# Altium PCB BoostUC3843.PcbDoc
Units mil, origin at the board's own origin, x right, y up, seen from the top; angles counter-clockwise.
Board outline 1560 x 1475 mil, 2 copper layers (Top Layer, Bottom Layer); 28 components, 16 nets, 67 pads, 2 vias.
Unrouted connection lines stored in the file: 13.
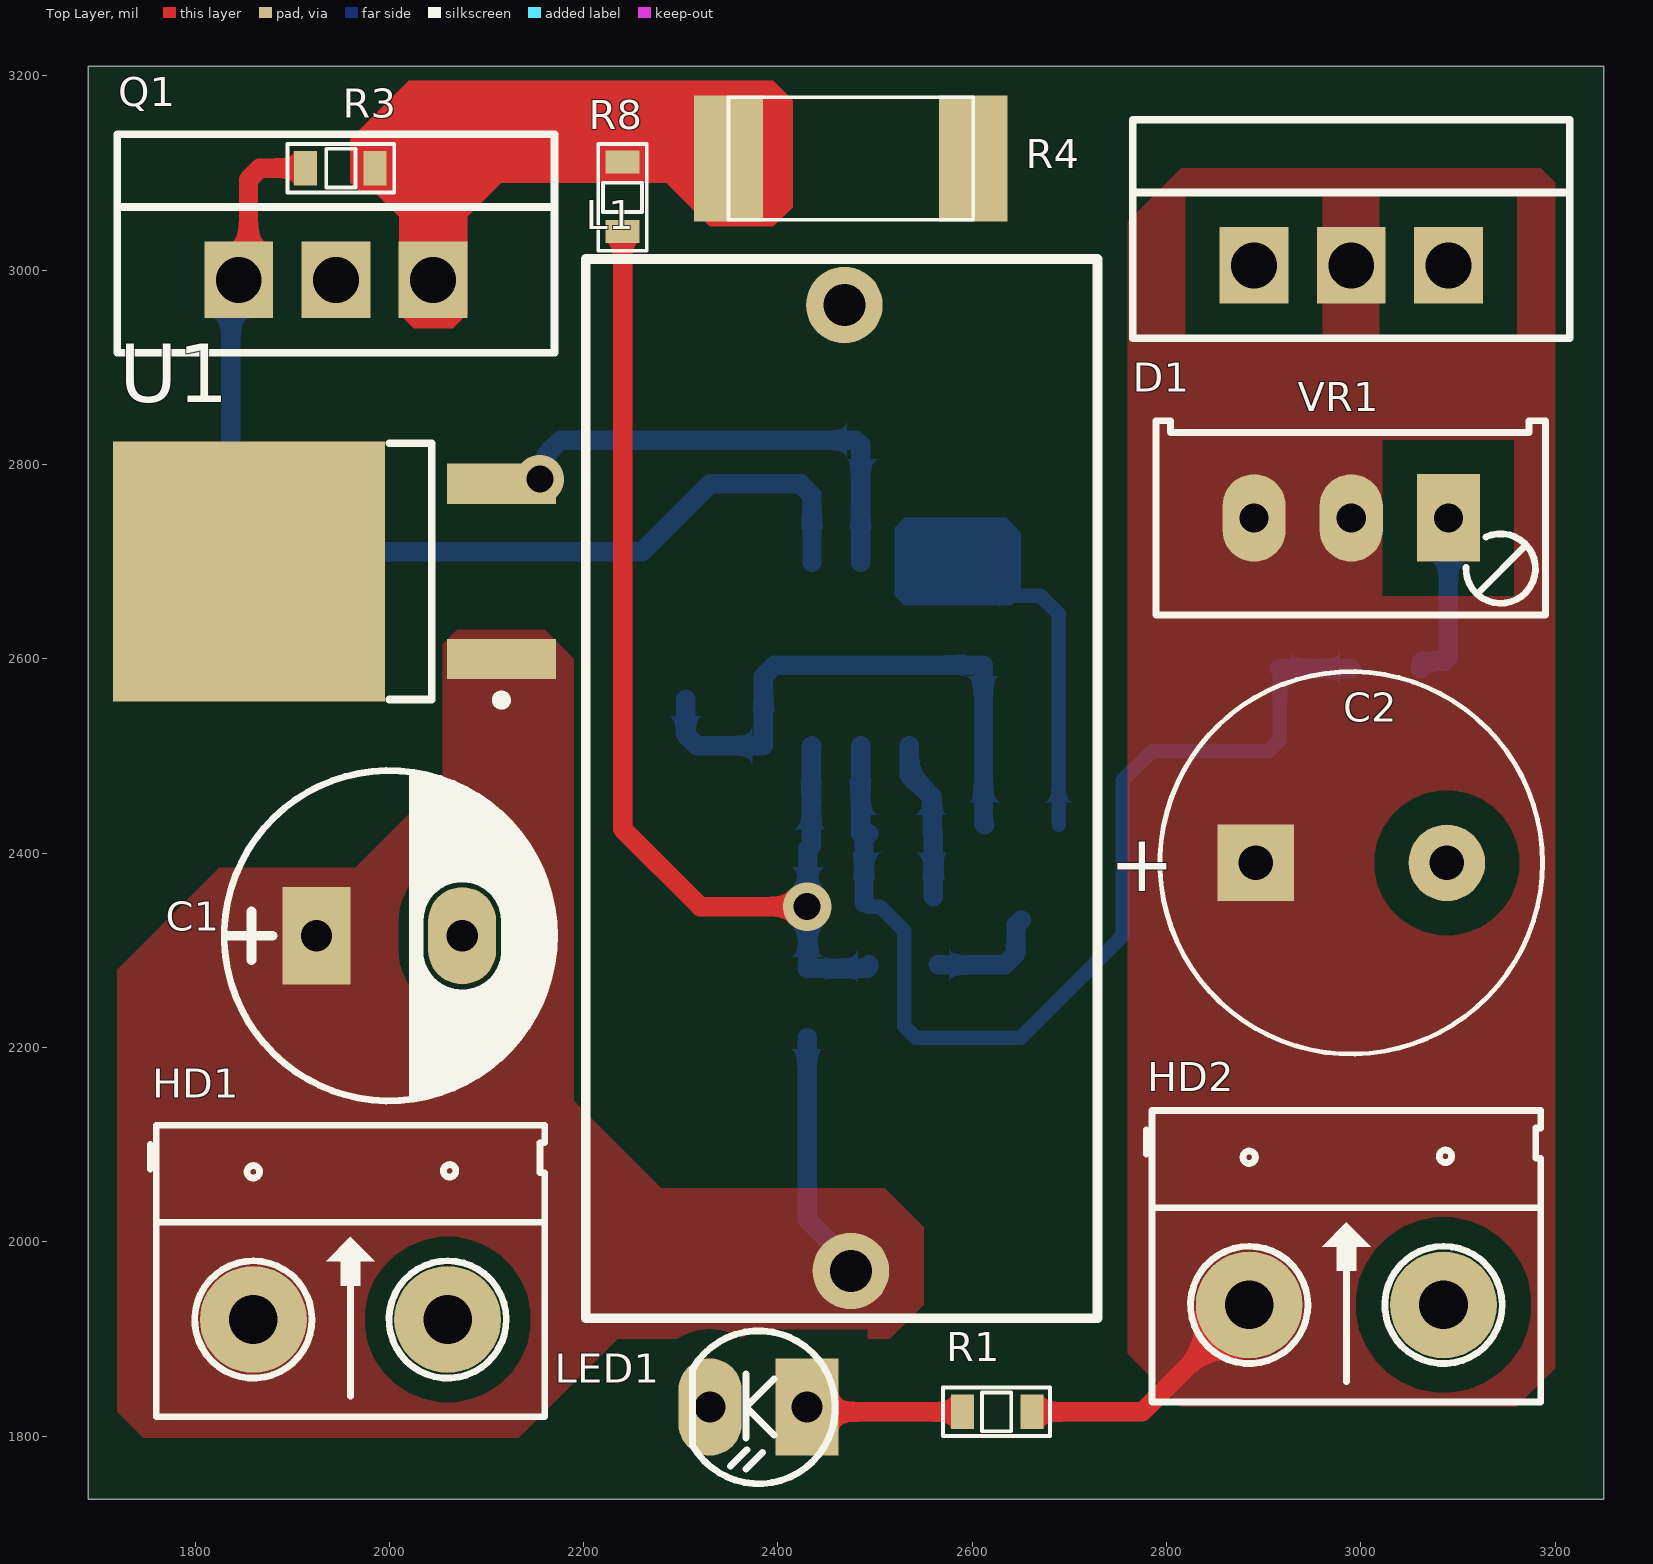
[diagram p0: Top Layer view]
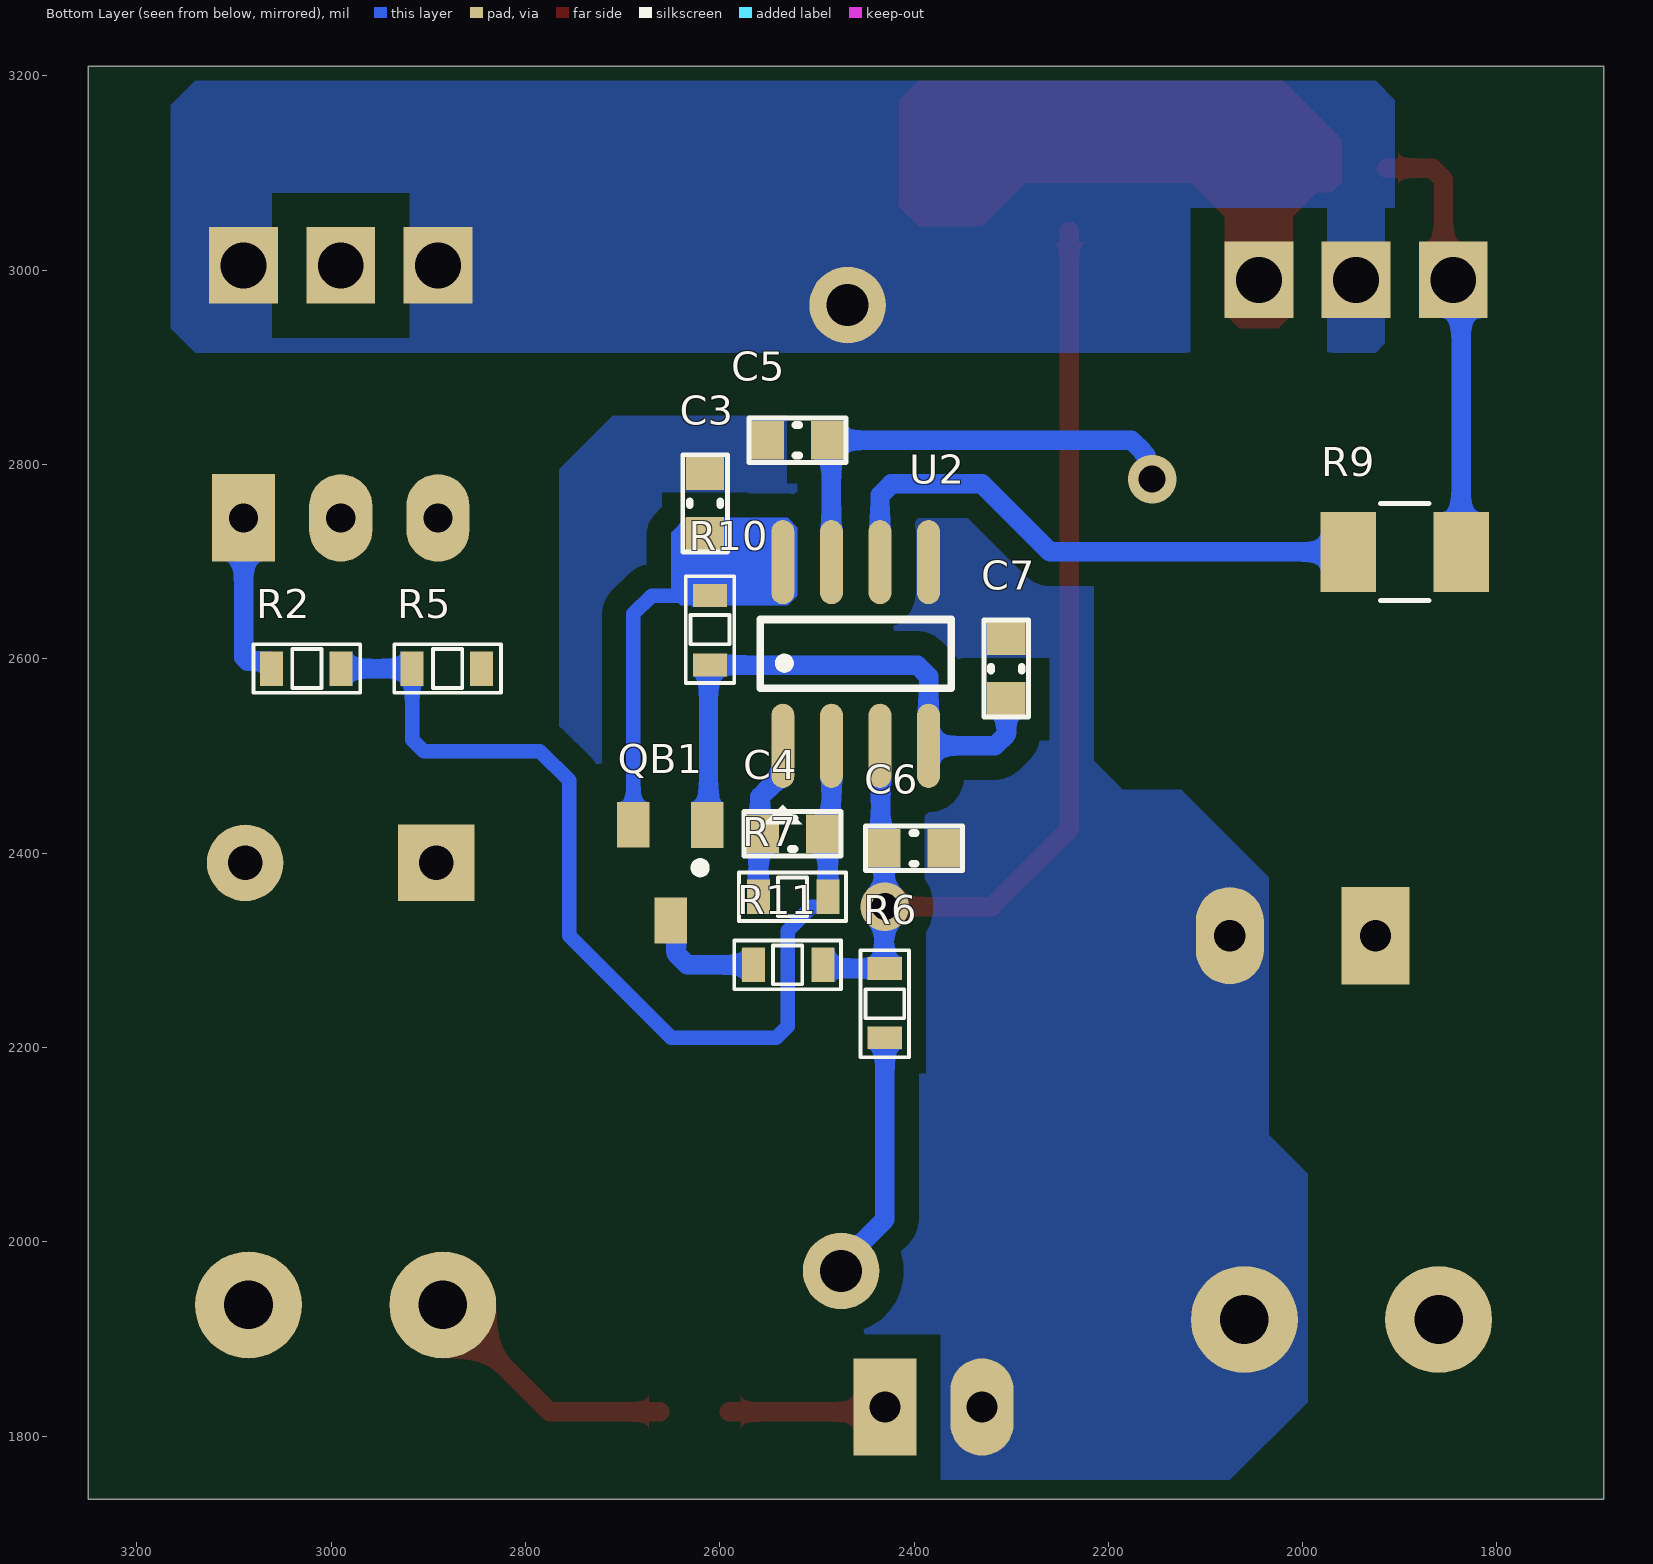
[diagram p1: Bottom Layer view, seen from below]
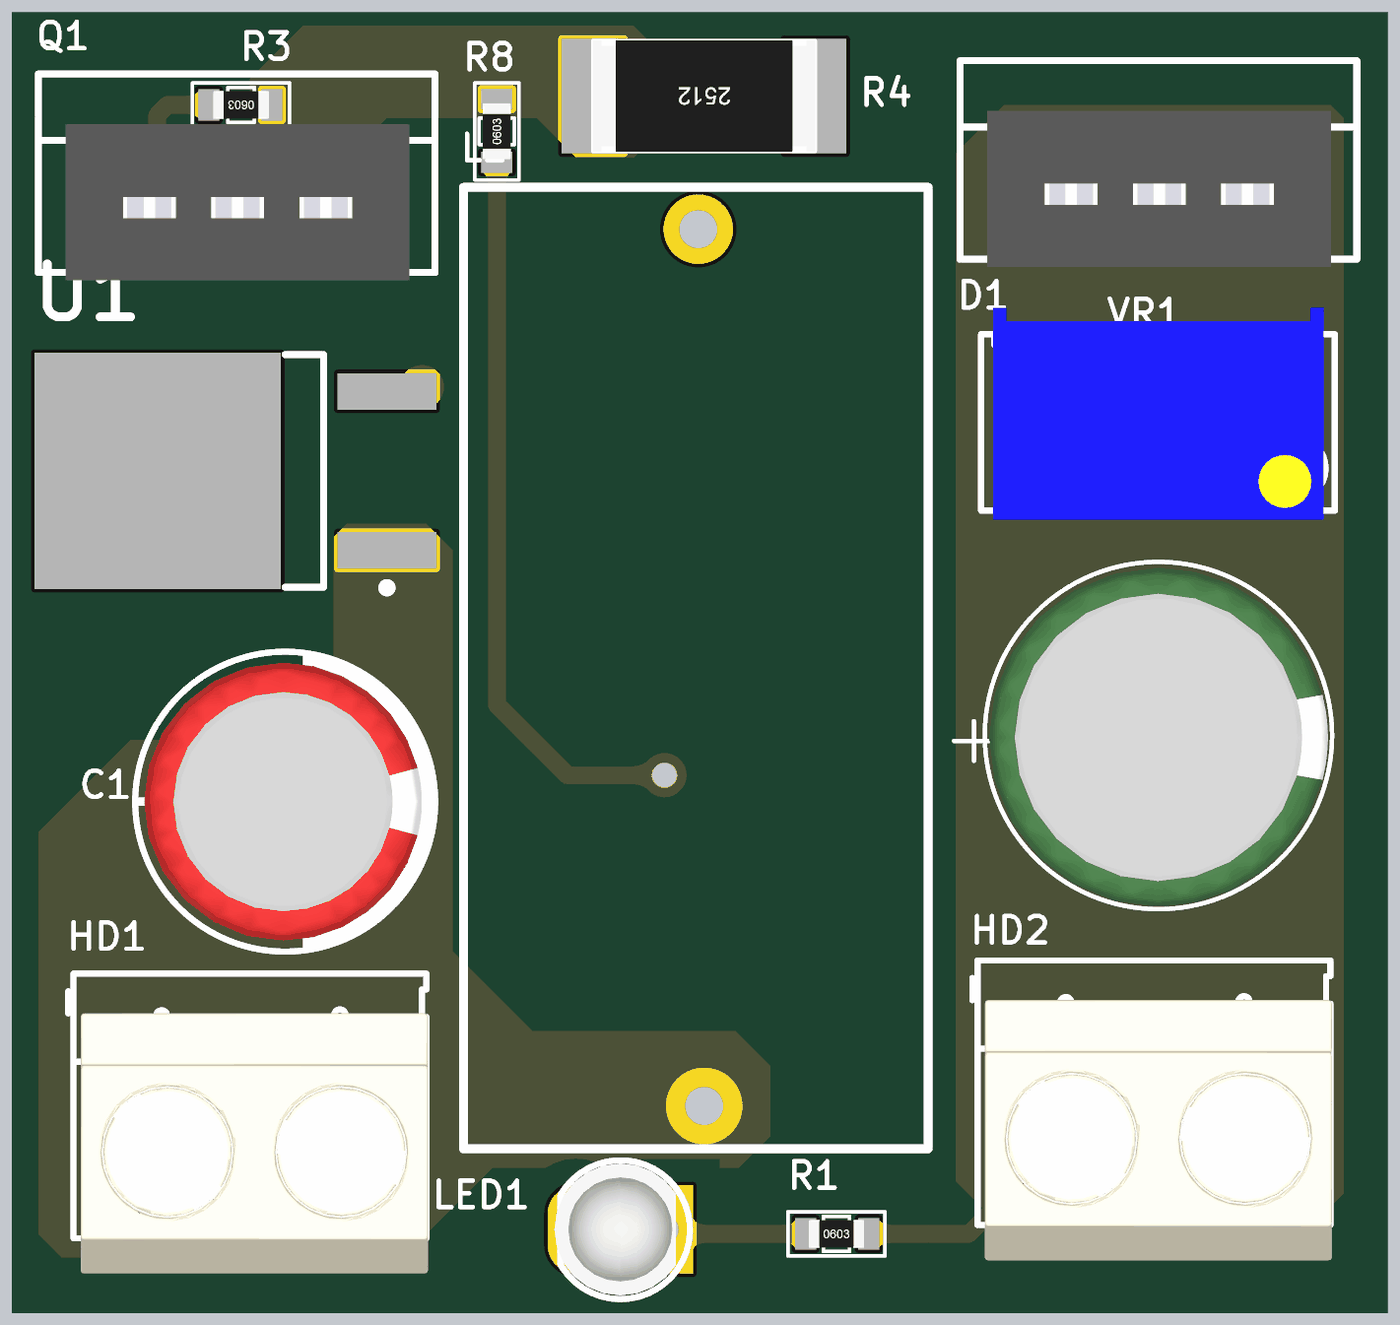
[diagram p2: 3D render of the assembled board from above, using the file's embedded part models]
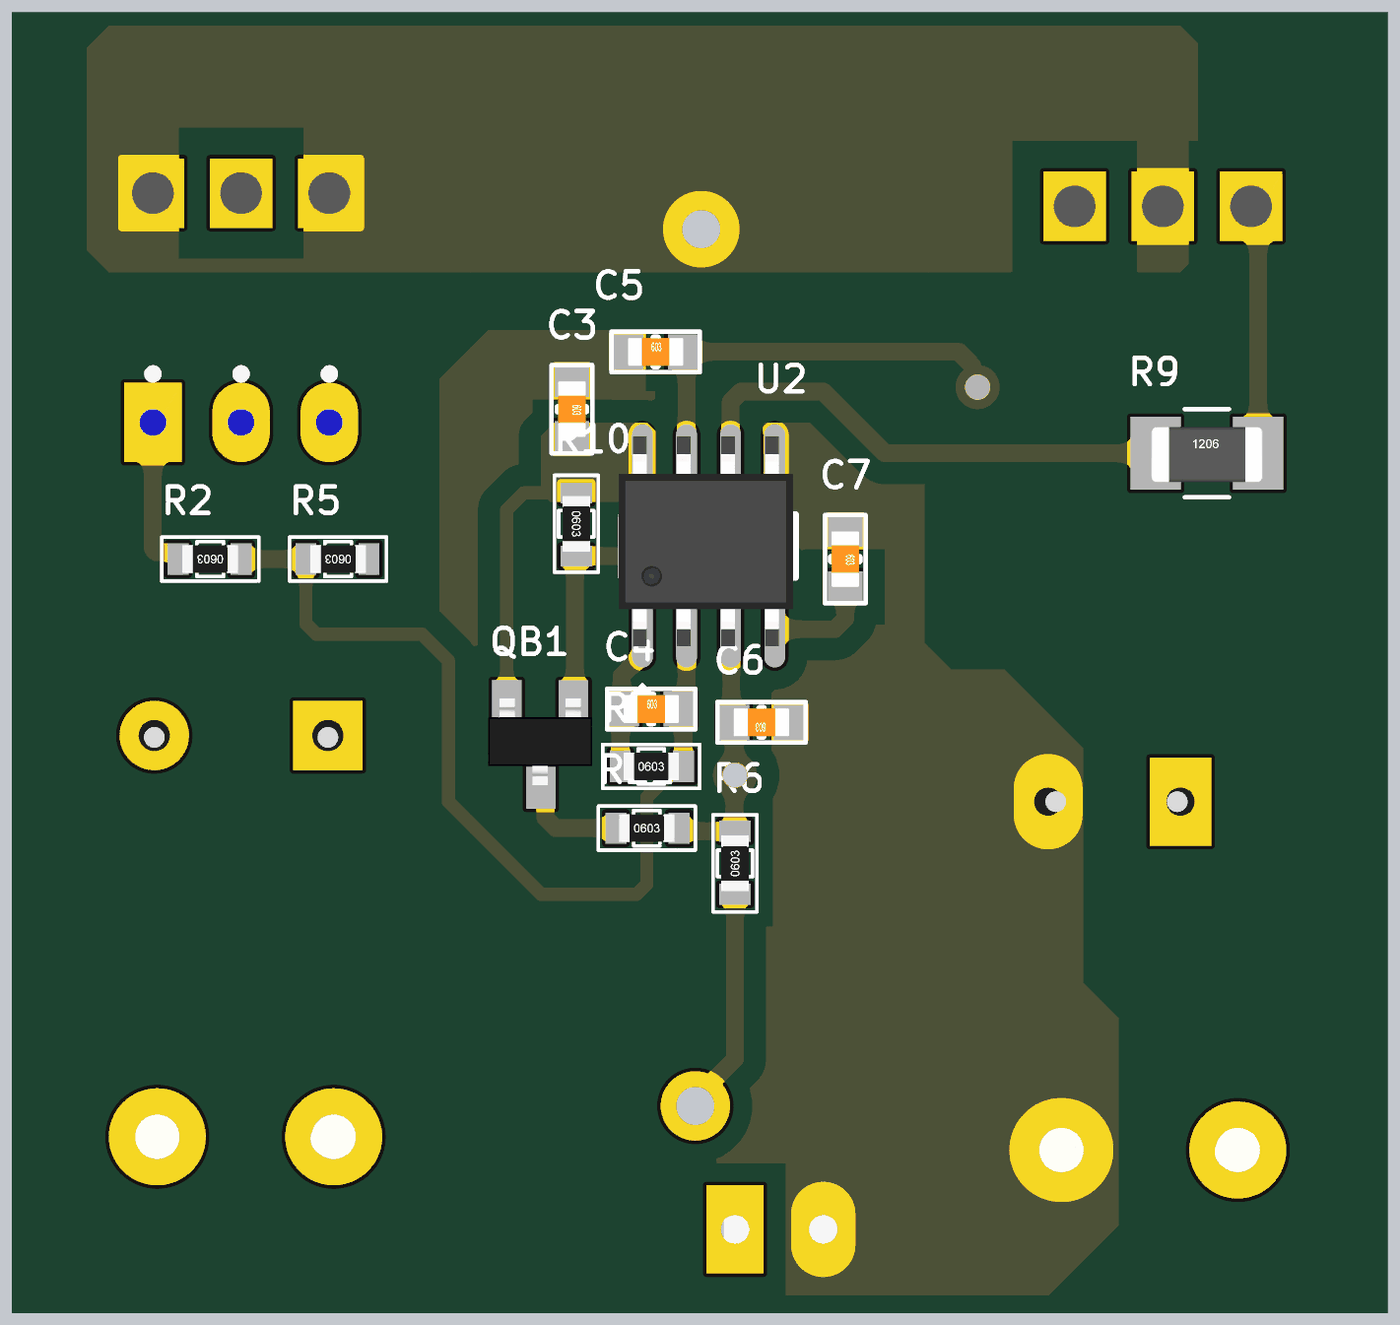
[diagram p3: 3D render of the assembled board from below, using the file's embedded part models]

## Layer stack, top to bottom
Top Solder: solder mask 0.4, Solder Resist, Dk 3.5
Top Layer: signal copper 1.4
Dielectric 1: dielectric 12.6, FR-4, Dk 4.8
Bottom Layer: signal copper 1.4
Bottom Solder: solder mask 0.4, Solder Resist, Dk 3.5

## Board outline
1690,1735 3250,1735 3250,3210 1690,3210

## Design rules (kind name [scope] priority, off if disabled: settings)
Clearance Clearance_5 [InNamedPolygon('GND_L02_P006')] p1: gap=25 ignorepadtopadclearanceinfootprint=FALSE
Clearance Clearance_4 [InNamedPolygon('GND_L02_P005')] p2: gap=25 ignorepadtopadclearanceinfootprint=FALSE
Clearance Clearance_2 [InNamedPolygon('VOUT_L01_P004')] p3: gap=35 ignorepadtopadclearanceinfootprint=FALSE
Clearance Clearance_1 [InNamedPolygon('D_FET_L02_P002')] p4: gap=35 ignorepadtopadclearanceinfootprint=FALSE
Clearance Clearance_3 [InNamedPolygon('VCC_L01_P001')] p5: gap=30 ignorepadtopadclearanceinfootprint=FALSE
Clearance [All] p6: gap=10 ignorepadtopadclearanceinfootprint=FALSE except(0: Arc-Hole Track-Hole SMDPad-Hole THPad-Hole Via-Hole Fill-Hole Poly-Hole Region-Hole Text-Hole)
PolygonConnect PolygonConnect_6 [All vs IsNamedPolygon('GND_L02_P006')] p1: connectstyle=Direct reliefconductorwidth=10 reliefentries=4 polygonreliefangle="90 Angle" airgapwidth=10
PolygonConnect PolygonConnect_5 [All vs IsNamedPolygon('GND_L02_P005')] p2: connectstyle=Direct reliefconductorwidth=10 reliefentries=4 polygonreliefangle="90 Angle" airgapwidth=10
PolygonConnect PolygonConnect_4 [All vs IsNamedPolygon('VOUT_L01_P004')] p3: thpad.connectstyle=Direct thpad.reliefconductorwidth=10 thpad.reliefentries=4 thpad.polygonreliefangle="90 Angle" thpad.airgapwidth=10 smdpad.connectstyle=Direct smdpad.reliefconductorwidth=10 smdpad.reliefentries=4 smdpad.polygonreliefangle="90 Angle" smdpad.airgapwidth=10 via.connectstyle=Relief via.reliefconductorwidth=10 via.reliefentries=4 via.polygonreliefangle="90 Angle" via.airgapwidth=10
PolygonConnect PolygonConnect_3 [All vs IsNamedPolygon('D_FET_L02_P002')] p4: connectstyle=Direct reliefconductorwidth=10 reliefentries=4 polygonreliefangle="90 Angle" airgapwidth=10
PolygonConnect PolygonConnect_2 [All vs IsNamedPolygon('VCC_L01_P001')] p5: thpad.connectstyle=Direct thpad.reliefconductorwidth=10 thpad.reliefentries=4 thpad.polygonreliefangle="90 Angle" thpad.airgapwidth=10 smdpad.connectstyle=Direct smdpad.reliefconductorwidth=10 smdpad.reliefentries=4 smdpad.polygonreliefangle="90 Angle" smdpad.airgapwidth=10 via.connectstyle=Relief via.reliefconductorwidth=10 via.reliefentries=4 via.polygonreliefangle="90 Angle" via.airgapwidth=10
PolygonConnect PolygonConnect_1 [All vs IsNamedPolygon('VCC_L01_P001')] p6: thpad.connectstyle=Direct thpad.reliefconductorwidth=10 thpad.reliefentries=4 thpad.polygonreliefangle="90 Angle" thpad.airgapwidth=10 smdpad.connectstyle=Direct smdpad.reliefconductorwidth=10 smdpad.reliefentries=4 smdpad.polygonreliefangle="90 Angle" smdpad.airgapwidth=10 via.connectstyle=Relief via.reliefconductorwidth=10 via.reliefentries=4 via.polygonreliefangle="90 Angle" via.airgapwidth=10
PolygonConnect [All] p7: connectstyle=Relief reliefconductorwidth=10 reliefentries=4 polygonreliefangle="90 Angle" airgapwidth=10
RoutingVias [All] p1: holewidth=28 width=50 viastyle="Through Hole" minholewidth=28 minwidth=50 maxholewidth=28 maxwidth=50
SolderMaskExpansion [All] p1: expansion=4 istentingtop=FALSE
Width [All] p1: maxlimit=70 minlimit=15 preferedwidth=50 toplayer_minwidth=20 minimp=50.000000 maximp=50.000000 favimp=50.000000
30 further rules are at their usual default settings.

## Components (designator, comment, footprint, x,y, rotation, side; value= is the part's Value field where it differs from the comment)
C1 "100uF/35V" CP1.5/3.4 1925,2315 r0 top value=100uF/35V/50V
C2 "100uF/35V" CA-ALU-10GR 2990,2390 r0 top value=100uF/35V/50V
C3 "0.1uF" CN-SMD-0603 2615,2760 r270 bottom value=103
C4 "100pF" CN-SMD-0603 2525,2420 r180 bottom value=103
C5 "0.1uF" CN-SMD-0603 2520,2825 r180 bottom value=103
C6 "100pF" CN-SMD-0603 2400,2405 r0 bottom value=103
C7 "1nF" CN-SMD-0603 2305,2590 r270 bottom value=103
D1 "Diode" TO-220 2990,3005 r0 top
HD1 "220VAC" HED2 1860,1920 r0 top value="Header 2"
HD2 "220VAC" HED2 2885,1935 r0 top value="Header 2"
L1 "150mH" 0077930A7-CORE 2470.28,2479.06 r270 top value="150 mH"
LED1 "LED" LED-3 2430,1830 r180 top value="LED 3 ly Single Colour"
Q1 "IRF840" TO-220 1945,2990 r0 top
QB1 "2SC5200" SOT23 2650,2380 r0 bottom value=D718
R1 "1k" RES-SMD-0603 2625,1825 r0 top value="R1/4W - 1K"
R2 "1k" RES-SMD-0603 3025,2590 r0 bottom value="R1/4W - 1K"
R3 "1k" RES-SMD-0603 1950,3105 r180 top value="R1/4W - 1K"
R4 "1R" RES-SMD-2512 2475,3120 r180 top value="R1/4W - 1K"
R5 "1k" RES-SMD-0603 2880,2590 r0 bottom value="R1/4W - 1K"
R6 "100k" RES-SMD-0603 2430,2245 r90 bottom value="R1/4W - 1K"
R7 "56k" RES-SMD-0603 2525,2355 r180 bottom value="R1/4W - 1K"
R8 "470R" RES-SMD-0603 2240,3075 r90 top value="R1/4W - 1K"
R9 "39R" R1206 1895,2710 r180 bottom value="R1/4W - 1K"
R10 "15K" RES-SMD-0603 2610,2630 r270 bottom value="R1/4W - 1K"
R11 "5K1" RES-SMD-0603 2530,2285 r180 bottom value="R1/4W - 1K"
U1 "7809" TO-252 1950,2690 r180 top
U2 "UC3843AN" SO-8 2460,2605 r90 bottom
VR1 "10K" VR1 3090,2745 r180 top value="VR 10K"

## Footprints (in the part's own frame and the unit in brackets; to place one, negate y for a bottom-side part, rotate by r counter-clockwise, add the part's x,y. Pads: shape width x height; smd on the part's side, far side on the other; paste and mask are expansions set on the pad)
0077930A7-CORE [mm]
  round 2 hole 1.1: 1(12.93,0.12) 2(-12.32,-0.05)
  silkscreen extent -13.52,-6.81 14.17,6.57
CA-ALU-10GR [mm] "Polarized capacitors, Aluminum Electrolytic Capacitors, 2-Leads, Body 10x20x5x0.6"
  rect 2x2 hole 0.9: 1(-2.5,0)
  round 2 hole 0.9: 2(2.5,0)
  silkscreen extent -5,-5 5,5, body extent -4.88,-4.93 4.88,4.83, height 13.12
CN-SMD-0603 [mm]
  rect 0.9x1 smd: 1(-0.8,0) 2(0.8,0)
  silkscreen extent -1.27,-0.58 1.27,0.58, body extent -0.8,-0.4 0.8,0.4, height 0.3
CP1.5/3.4 [mil] "Tu hoa 220->470uF,16V, 470uF/16V,25V"
  rect 70x100 hole 32: 1(0,0)
  oval 70x100 hole 32: 2(150,0)
  silkscreen extent -95,-170 245,170, body extent -85,-157 230,157, height 446
HED2 [mil] "Header 2, 2 pin, hight 300mil, Pin to Pin 200, Colour Green"
  round 110 hole 50: 1(0,0) 2(200,0)
  silkscreen extent -106,-100 300,200, body extent -92,-140 302,155, height 394
LED-3 [mil] "LED 2 PIN, 3ly Only colour"
  rect 65x100 hole 32: 1(0,0)
  oval 65x100 hole 32: 2(100,0)
  silkscreen extent -29,-78 118,79, body extent -13,-75 125,75, height 217
R1206 [mm]
  rect 1.45x2.1 smd: 1(-1.475,0) 2(1.475,0)
  silkscreen extent -0.64,-1.27 0.64,1.27, body extent -1.6,-0.84 1.6,0.76, height 1
RES-SMD-0603 [mm]
  rect 0.6x0.9 smd: 1(-0.889,0) 2(0.927,0)
  silkscreen extent -1.4,-0.64 1.4,0.64, body extent -0.8,-0.4 0.8,0.4, height 0.43
RES-SMD-2512 [mm] "Chip Capacitor, Body 3.2x2.5mm, IPC Medium Density"
  rect 1.8x3.3 smd: 1(-3.2,0.127) 2(3.2,0.127)
  silkscreen extent -3.2,-1.47 3.2,1.73, body extent -3.2,-1.47 3.2,1.73, height 0.6
SO-8 [mm] "8-Pin Small Outline Integrated Circuit 1.27 mm Pitch, IPC Medium Density"
  oval 2.2x0.6 smd: 1(-2.4,1.905) 2(-2.4,0.635) 3(-2.4,-0.635) 4(-2.4,-1.905) 5(2.4,-1.905) 6(2.4,-0.635) 7(2.4,0.635) 8(2.4,1.905)
  silkscreen extent -4.44,-2.5 0.9,2.5, body extent -2.89,-2.43 3.15,2.59, height 1.6
SOT23 [mm] "SOT 23 _ 1-3-2"
  rect 0.85x1.2 smd: 1(-0.94,-1.245) 2(0.985,-1.25) 3(0.005,1.25)
  silkscreen extent -0.88,-0.25 -0.64,0, body extent -1.47,-1.33 1.53,1.17, height 1.06
TO-220 [mm]
  rect 1.8x2 hole 1.2: 1(-2.54,0) 2(0,0) 3(2.54,0)
  silkscreen extent -5.71,-1.91 5.71,3.81, body extent -4.92,-2.13 4.98,2.37, height 8.08
TO-252 [mm] "KVU D-PAK, 3-Pads, Body 6,2x6,7mm (max), IPC Medium Density"
  rect 2.85x1.05 smd: 1(-4.2,2.29) 3(-4.2,-2.29)
  rect 7.1x6.8 smd: 2(2.4,0)
  silkscreen extent -4.33,-3.35 -1.27,3.49, body extent -5.03,-3.35 5.08,3.35, height 2.4
VR1 [mil] "Variable Resistor"
  rect 65x90 hole 30: 1(0,0)
  oval 65x90 hole 30: 2(100,0) 3(200,0)
  silkscreen extent -100,-100 301,100, body extent -88,-130 288,110, height 455

## Part data
C1 C2: library part CP3, "Cap 100uF/35V - 470uF/16V", Description 1="1000uF/6,3V - 470uF/16V - 330uF - 25V", Description 2="220uF/35V - 100uF/50V - 63V - 4,7uF/200V", Description 3="22uF => 33uF100V - 3,3uF => 4,7uF/250V", Description 4="2,2uF =>3,3uF/350 - 2,2uF/400V - 1uF/450V"
C3 C4 C5 C6 C7: library part CM, "Cap SMD"
HD1 HD2: library part Hed2, "Header 2 (Green)"
L1: library part L1, "Inductor"
LED1: "LED Single colour Green and Red"
Q1: "MOSFET N - CHANNEL 500V - 0.75 - 8A - TO-220"
QB1: "Transistor Power Supply"
R1 R2 R3 R4 R5 R6 R7 R8 R9 R10 R11: library part RES_SMD, "Resistor 1/4W"
U1: "Positive Voltage Regulator", ComponentLink1Description="Manufacturer Link", ComponentLink1URL=http://www.st.com/, ComponentLink2Description=Datasheet, ComponentLink2URL=http://www.st.com/stonline/products/literature/ds/2146/l78m05c.pdf, DatasheetVersion=Apr-1994, LatestRevisionDate=17-Jul-2002, LatestRevisionNote="Re-released for DXP Platform.", Note="Tab is connected to pin 3 (GND).", PackageDescription="SIP; 3 Leads; Body 10.9 x 7.6 x 2.6 mm (typ); Pitch 2.2 mm", PackageReference=SOT82C, Published=24-Aug-2001, Publisher="Altium Limited"
U2: "High-Performance Current Mode PWM Controller", Code_JEDEC=MO-001-AN, ComponentLink1Description="Manufacturer Link", ComponentLink1URL=http://www.st.com/, ComponentLink2Description=Datasheet, ComponentLink2URL=http://www.st.com/stonline/products/literature/ds/4298/uc3842a.pdf, DatasheetVersion=Mar-1999, LatestRevisionDate=06-Jun-2005, LatestRevisionNote="Stylized 3D Model Added.", PackageDescription="DIP; 8 Leads; Row Spacing 7.62 mm; Pitch 2.54 mm", PackageReference=DIP8, Published=24-Aug-2001, Publisher="Altium Limited"
VR1: library part VR, "Var Resistor"

## Via types
v1: diameter 50, hole 28, Top Layer to Bottom Layer, tented both sides, 2 vias

## Nets (pads, with @x,y where several pads share a name; then routed paths per layer and width w, separated by ;. In a path a pad name is that pad's centre, name@x,y a point inside that pad or via, vN(x,y) a via of type N, cw(c..) or ccw(c..) an arc to the next point about the centre after c; other vN are vias at no path point)
CS: Q1.3 R3.1 R4.2 R8.2 | length 163.3
  Top Layer w20: R3.1 2025,3105 2034.97,3095.03 2045,3085 Q1.3
D_fet: D1.1 D1.3 L1.2 Q1.2
FB: C4.2 R2.1 R5.2 R7.2 U2.2 | length 1080.1
  Bottom Layer w15: R7.2 2488.51,2349.1 2492.82,2344.79 2505.21,2344.79 2530,2320 2530,2221.72 2541.72,2210 2650,2210 2755,2315 2755,2475 2785,2505 2904.78,2505 2916.49,2516.72 R5.2
  Bottom Layer w20: C4.2@2485,2420 U2.2 ; R7.2@2488.51,2349.1 2488.51,2415.01 C4.2 ; R5.2 R2.1
Gate: Q1.1 R3.2 R9.2 | length 454.1
  Top Layer w20: Q1.1 1855,3000 1855,3093.28 1866.72,3105 R3.2
  Bottom Layer w20: R9.2 1836.93,2981.93 Q1.1
GND: C1.2 C2.2 C3.1 C5.1 C6.1 C7.1 HD1.2 HD2.2 LED1.2 R4.1 R5.1 U1.2 U2.5
NetC4_1: C4.1 R7.1 U2.1 | length 166.8
  Bottom Layer w20: U2.1 2535,2480 2536.67,2478.32 2538.2,2478.32 2558.55,2457.97 2558.55,2421.45 2560,2420 R7.1
NetC6_2: C6.2 R6.2 R8.1 R11.2 U2.3 | length 1135.2
  Top Layer w20: R8.1 2240,2425 2320,2345 v1(2430,2345)
  Bottom Layer w20: U2.3 2434.31,2509.82 2434.31,2407.81 C6.2 2430.75,2404.25 2430.75,2282.23 R6.2 2491.7,2281.49 2493.51,2283.3 R11.2
NetC7_2: C7.2 QB1.1 R10.2 U2.4 | length 587.4
  Bottom Layer w20: C7.2 2305,2522.23 2316.72,2510.51 U2.4 2385,2581.8 2396.72,2593.51 R10.2 ; R10.2@2611.5,2593.51 2611.5,2430.5 QB1.1
NetLED1_1: LED1.1 R1.1 | length 162.1
  Top Layer w20: LED1.1 2435,1825 R1.1
NetQB1_3: QB1.3 R11.1 | length 121.1
  Bottom Layer w20: R11.1 2633.28,2285 2645,2296.72 2645,2325.59 QB1.3
NetR2_2: R2.2 VR1.1 | length 180.1
  Bottom Layer w20: R2.2 3061.49,2595.9 3063.3,2597.71 3086,2597.71 3090,2601.71 VR1.1
NetR9_1: R9.1 U2.6 | length 584.6
  Bottom Layer w20: R9.1 2260,2710 2330,2780 2423.28,2780 2435,2768.28 U2.6
VCC: C1.1 HD1.1 L1.1 R6.1 U1.1 | length 258.6
  Bottom Layer w20: R6.1 2430,2023.1 2475,1978.1 L1.1
VDD: C5.2 U1.3 U2.7 | length 480.2
  Bottom Layer w20: v1(2155,2785) 2160.74,2790.74 2160.74,2808.7 2164.49,2812.45 2164.49,2813.29 2176.21,2825.01 2479.99,2825.01 2485,2820 U2.7
Vout: C2.1 D1.2 HD2.1 R1.2 VR1.2 VR1.3 | length 269.1
  Top Layer w20: R1.2 2775,1825 HD2.1
Vref: C3.2 QB1.2 R10.1 U2.8 | length 303.6
  Bottom Layer w15: R10.1 2670,2665 2688.8,2646.2 QB1.2

## Polygon pours and split planes (outlines as drawn)
Vout on Top Layer "VOUT_L01_P004" (solid, remove dead copper, pour order 4): 2760,3050 2815,3105 3185,3105 3200,3090 3200,1870 3160,1830 2815,1830 2760,1885
VCC on Top Layer "VCC_L01_P001" (solid, remove dead copper, pour order 1): 1720,2280 1825,2385 1965,2385 2055,2475 2055,2615 2070,2630 2160,2630 2190,2600 2190,2145 2280,2055 2510,2055 2550,2015 2550,1935 2515,1900 2235,1900 2133.08,1798.08 1746.92,1798.08 1720,1825
GND on Bottom Layer "GND_L02_P006" (solid, remove dead copper, pour order 6): 2035,2375 2125,2465 2185,2465 2215,2495 2215,2740 2325,2850 2710,2850 2765,2795 2765,1845 2675,1755 2075,1755 1995,1835 1995,2070 2035,2110
D_fet on Bottom Layer "D_FET_L02_P002" (solid, remove dead copper, pour order 2): 1905,3175 1925,3195 3140,3195 3165,3170 3165,2940 3140,2915 1925,2915 1905,2935

## Other copper
Top Layer:
  region net CS: 2010,3055 1985,3080 1970,3080 1960,3090 1960,3135 2020,3195 2395,3195 2415,3175 2415,3065 2395,3045 2330,3045 2285,3090 2115,3090 2080,3055 2080,2955 2065,2940 2025,2940 2010,2955
Bottom Layer:
  region net Vref: 2520,2735 2530,2745 2635,2745 2650,2730 2650,2665 2640,2655 2530,2655 2520,2665

## Text inside footprints (layer, text, board x,y; h text height)
C2: Top Overlay "+" at 2740.98,2360.98 h59.06